# Altium PCB PCB1.PcbDoc (part 3 of 3)
Units mil, origin at the board's own origin, x right, y up, seen from the top; angles counter-clockwise.
Board outline 3543.31 x 5118.11 mil, 2 copper layers (Top Layer, Bottom Layer); 56 components, 55 nets, 300 pads, 86 vias.
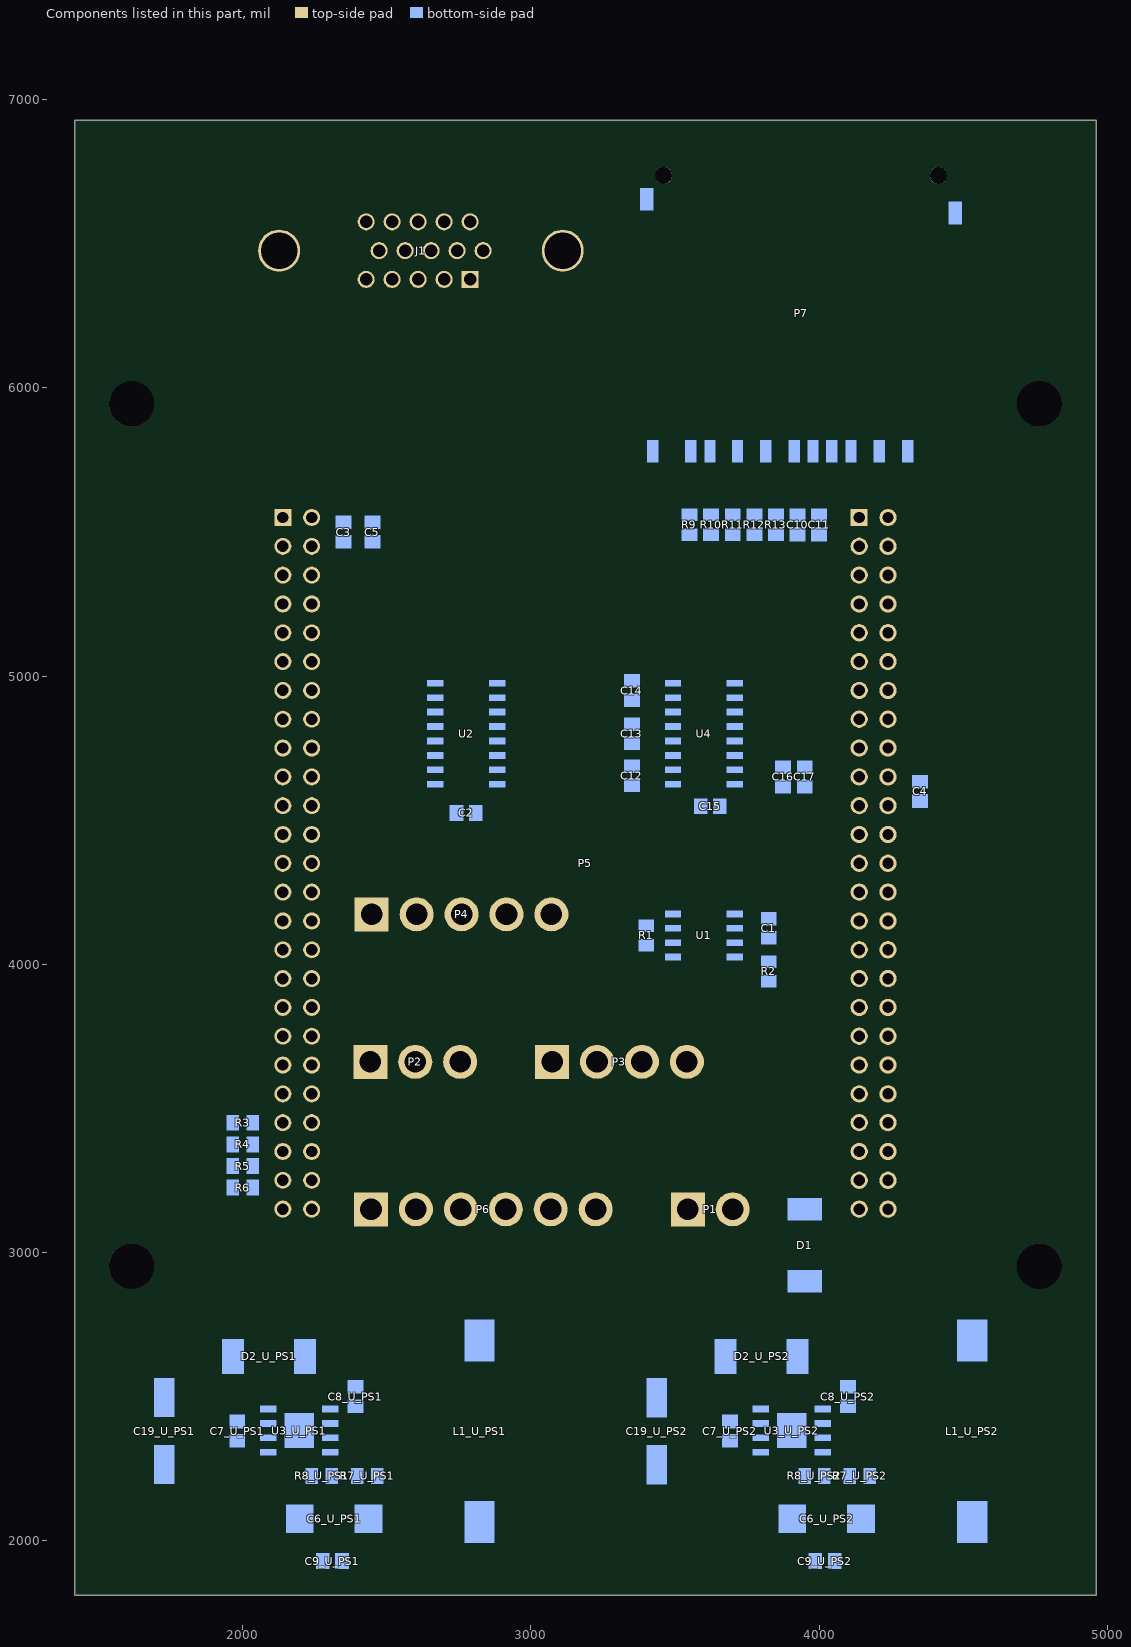
[diagram p3: the components of this part, seen from the top]

## Via types
v1: diameter 35.43/35.43 (per signal layer), hole 11.81, Top Layer to Bottom Layer, tented both sides, 52 vias
v2: diameter 47.24/47.24 (per signal layer), hole 19.68, Top Layer to Bottom Layer, tented both sides, 19 vias
v3: diameter 35.43, hole 11.81, Top Layer to Bottom Layer, tented top, 12 vias
v4: diameter 47.24/47.24 (per signal layer), hole 19.68, Top Layer to Bottom Layer, 3 vias

## Nets (pads, with @x,y where several pads share a name; then routed paths per layer and width w, separated by ;. In a path a pad name is that pad's centre, name@x,y a point inside that pad or via, vN(x,y) a via of type N, cw(c..) or ccw(c..) an arc to the next point about the centre after c; other vN are vias at no path point) (continued)
copper on no net: (continued)
  Bottom Layer w1: 1645.06,5074.6 1645.06,5111.6 ; 1645.06,5134.6 1645.06,5204.6 ; 1645.06,5210.6 1645.06,5212.6 ; 1645.06,5251.6 1645.06,5275.6 ; 1645.06,5281.6 1645.06,5283.6 ; 1645.06,5321.6 1645.06,5448.6 ; 1646.06,4827.6 1646.06,4909.6 ; 1646.06,4956.6 1646.06,4980.6 ; 1646.06,5026.6 1646.06,5051.6 ; 1646.06,5074.6 1646.06,5111.6 ; 1646.06,5134.6 1646.06,5205.6 ; 1646.06,5210.6 1646.06,5213.6 ; 1646.06,5252.6 1646.06,5276.6 ; 1646.06,5281.6 1646.06,5284.6 ; 1646.06,5319.6 1646.06,5448.6 ; 1647.06,4827.6 1647.06,4911.6 ; 1647.06,4956.6 1647.06,4984.6 ; 1647.06,5022.6 1647.06,5051.6 ; 1647.06,5074.6 1647.06,5111.6 ; 1647.06,5134.6 1647.06,5205.6 ; 1647.06,5211.6 1647.06,5213.6 ; 1647.06,5253.6 1647.06,5276.6 ; 1647.06,5282.6 1647.06,5284.6 ; 1647.06,5318.6 1647.06,5448.6 ; 1648.06,4827.6 1648.06,4924.6 ; 1648.06,4954.6 1648.06,4991.6 ; 1648.06,5015.6 1648.06,5051.6 ; 1648.06,5072.6 1648.06,5111.6 ; 1648.06,5134.6 1648.06,5205.6 ; 1648.06,5211.6 1648.06,5214.6 ; 1648.06,5254.6 1648.06,5277.6 ; 1648.06,5283.6 1648.06,5285.6 ; 1648.06,5316.6 1648.06,5448.6 ; 1649.06,4827.6 1649.06,5205.6 ; 1649.06,5211.6 1649.06,5215.6 ; 1649.06,5256.6 1649.06,5278.6 ; 1649.06,5283.6 1649.06,5286.6 ; 1649.06,5315.6 1649.06,5448.6 ; 1650.06,4827.6 1650.06,5205.6 ; 1650.06,5211.6 1650.06,5215.6 ; 1650.06,5257.6 1650.06,5278.6 ; 1650.06,5284.6 1650.06,5286.6 ; 1650.06,5313.6 1650.06,5316.6 ; 1650.06,5320.6 1650.06,5448.6 ; 1651.06,4827.6 1651.06,5205.6 ; 1651.06,5212.6 1651.06,5216.6 ; 1651.06,5259.6 1651.06,5279.6 ; 1651.06,5284.6 1651.06,5287.6 ; 1651.06,5312.6 1651.06,5315.6 ; 1651.06,5320.6 1651.06,5448.6 ; 1652.06,4827.6 1652.06,5205.6 ; 1652.06,5212.6 1652.06,5217.6 ; 1652.06,5261.6 1652.06,5280.6 ; 1652.06,5285.6 1652.06,5287.6 ; 1652.06,5310.6 1652.06,5315.6 ; 1652.06,5321.6 1652.06,5448.6 ; 1653.06,4827.6 1653.06,5206.6 ; 1653.06,5212.6 1653.06,5218.6 ; 1653.06,5262.6 1653.06,5280.6 ; 1653.06,5285.6 1653.06,5287.6 ; 1653.06,5309.6 1653.06,5315.6 ; 1653.06,5321.6 1653.06,5448.6 ; 1654.06,4827.6 1654.06,5206.6 ; 1654.06,5212.6 1654.06,5219.6 ; 1654.06,5264.6 1654.06,5281.6 ; 1654.06,5286.6 1654.06,5288.6 ; 1654.06,5308.6 1654.06,5315.6 ; 1654.06,5321.6 1654.06,5448.6 ; 1655.06,4827.6 1655.06,5206.6 ; 1655.06,5212.6 1655.06,5220.6 ; 1655.06,5265.6 1655.06,5281.6 ; 1655.06,5287.6 1655.06,5288.6 ; 1655.06,5307.6 1655.06,5316.6 ; 1655.06,5321.6 1655.06,5448.6 ; 1656.06,4827.6 1656.06,5206.6 ; 1656.06,5212.6 1656.06,5221.6 ; 1656.06,5258.6 1656.06,5259.6 ; 1656.06,5267.6 1656.06,5282.6 ; 1656.06,5287.6 1656.06,5289.6 ; 1656.06,5306.6 1656.06,5316.6 ; 1656.06,5322.6 1656.06,5448.6 ; 1657.06,4827.6 1657.06,5206.6 ; 1657.06,5212.6 1657.06,5222.6 ; 1657.06,5259.6 1657.06,5261.6 ; 1657.06,5268.6 1657.06,5283.6 ; 1657.06,5288.6 1657.06,5289.6 ; 1657.06,5306.6 1657.06,5316.6 ; 1657.06,5322.6 1657.06,5448.6 ; 1658.06,4827.6 1658.06,5206.6 ; 1658.06,5212.6 1658.06,5223.6 ; 1658.06,5260.6 1658.06,5262.6 ; 1658.06,5270.6 1658.06,5283.6 ; 1658.06,5288.6 1658.06,5290.6 ; 1658.06,5305.6 1658.06,5317.6 ; 1658.06,5322.6 1658.06,5448.6 ; 1659.06,4827.6 1659.06,5206.6 ; 1659.06,5212.6 1659.06,5224.6 ; 1659.06,5262.6 1659.06,5263.6 ; 1659.06,5271.6 1659.06,5284.6 ; 1659.06,5289.6 1659.06,5290.6 ; 1659.06,5305.6 1659.06,5317.6 ; 1659.06,5322.6 1659.06,5448.6 ; 1660.06,4827.6 1660.06,5206.6 ; 1660.06,5212.6 1660.06,5225.6 ; 1660.06,5263.6 1660.06,5265.6 ; 1660.06,5272.6 1660.06,5284.6 ; 1660.06,5289.6 1660.06,5291.6 ; 1660.06,5304.6 1660.06,5317.6 ; 1660.06,5323.6 1660.06,5448.6 ; 1661.06,4827.6 1661.06,5207.6 ; 1661.06,5212.6 1661.06,5226.6 ; 1661.06,5264.6 1661.06,5266.6 ; 1661.06,5273.6 1661.06,5284.6 ; 1661.06,5290.6 1661.06,5291.6 ; 1661.06,5304.6 1661.06,5318.6 ; 1661.06,5323.6 1661.06,5448.6 ; 1662.06,4827.6 1662.06,5137.6 ; 1662.06,5139.6 1662.06,5207.6 ; 1662.06,5212.6 1662.06,5225.6 ; 1662.06,5266.6 1662.06,5268.6 ; 1662.06,5274.6 1662.06,5285.6 ; 1662.06,5290.6 1662.06,5292.6 ; 1662.06,5303.6 1662.06,5318.6 ; 1662.06,5323.6 1662.06,5448.6 ; 1663.06,4827.6 1663.06,5137.6 ; 1663.06,5143.6 1663.06,5207.6 ; 1663.06,5213.6 1663.06,5225.6 ; 1663.06,5267.6 1663.06,5269.6 ; 1663.06,5275.6 1663.06,5285.6 ; 1663.06,5290.6 1663.06,5292.6 ; 1663.06,5303.6 1663.06,5319.6 ; 1663.06,5324.6 1663.06,5448.6 ; 1664.06,4827.6 1664.06,5138.6 ; 1664.06,5146.6 1664.06,5207.6 ; 1664.06,5213.6 1664.06,5225.6 ; 1664.06,5269.6 1664.06,5270.6 ; 1664.06,5275.6 1664.06,5286.6 ; 1664.06,5291.6 1664.06,5292.6 ; 1664.06,5302.6 1664.06,5319.6 ; 1664.06,5324.6 1664.06,5448.6 ; 1665.06,4827.6 1665.06,5140.6 ; 1665.06,5149.6 1665.06,5207.6 ; 1665.06,5213.6 1665.06,5225.6 ; 1665.06,5270.6 1665.06,5272.6 ; 1665.06,5275.6 1665.06,5286.6 ; 1665.06,5291.6 1665.06,5293.6 ; 1665.06,5302.6 1665.06,5320.6 ; 1665.06,5325.6 1665.06,5448.6 ; 1666.06,4827.6 1666.06,5142.6 ; 1666.06,5153.6 1666.06,5202.6 ; 1666.06,5205.6 1666.06,5207.6 ; 1666.06,5213.6 1666.06,5225.6 ; 1666.06,5271.6 1666.06,5286.6 ; 1666.06,5291.6 1666.06,5293.6 ; 1666.06,5301.6 1666.06,5320.6 ; 1666.06,5325.6 1666.06,5448.6 ; 1667.06,4827.6 1667.06,5144.6 ; 1667.06,5159.6 1667.06,5192.6 ; 1667.06,5205.6 1667.06,5207.6 ; 1667.06,5213.6 1667.06,5225.6 ; 1667.06,5272.6 1667.06,5287.6 ; 1667.06,5292.6 1667.06,5293.6 ; 1667.06,5300.6 1667.06,5320.6 ; 1667.06,5326.6 1667.06,5448.6 ; 1668.06,4827.6 1668.06,5147.6 ; 1668.06,5167.6 1668.06,5182.6 ; 1668.06,5205.6 1668.06,5208.6 ; 1668.06,5214.6 1668.06,5225.6 ; 1668.06,5273.6 1668.06,5287.6 ; 1668.06,5292.6 1668.06,5293.6 ; 1668.06,5300.6 1668.06,5321.6 ; 1668.06,5326.6 1668.06,5448.6 ; 1669.06,4827.6 1669.06,5149.6 ; 1669.06,5206.6 1669.06,5208.6 ; 1669.06,5214.6 1669.06,5225.6 ; 1669.06,5267.6 1669.06,5268.6 ; 1669.06,5273.6 1669.06,5287.6 ; 1669.06,5292.6 1669.06,5294.6 ; 1669.06,5299.6 1669.06,5321.6 ; 1669.06,5327.6 1669.06,5448.6 ; 1670.06,4827.6 1670.06,5153.6 ; 1670.06,5206.6 1670.06,5208.6 ; 1670.06,5214.6 1670.06,5225.6 ; 1670.06,5268.6 1670.06,5270.6 ; 1670.06,5273.6 1670.06,5288.6 ; 1670.06,5292.6 1670.06,5294.6 ; 1670.06,5298.6 1670.06,5322.6 ; 1670.06,5327.6 1670.06,5448.6 ; 1671.06,4827.6 1671.06,5157.6 ; 1671.06,5206.6 1671.06,5208.6 ; 1671.06,5214.6 1671.06,5225.6 ; 1671.06,5268.6 1671.06,5288.6 ; 1671.06,5292.6 1671.06,5294.6 ; 1671.06,5297.6 1671.06,5322.6 ; 1671.06,5328.6 1671.06,5448.6 ; 1672.06,4827.6 1672.06,5162.6 ; 1672.06,5197.6 1672.06,5209.6 ; 1672.06,5214.6 1672.06,5224.6 ; 1672.06,5268.6 1672.06,5288.6 ; 1672.06,5292.6 1672.06,5294.6 ; 1672.06,5295.6 1672.06,5323.6 ; 1672.06,5328.6 1672.06,5448.6 ; 1673.06,4827.6 1673.06,5172.6 ; 1673.06,5188.6 1673.06,5209.6 ; 1673.06,5215.6 1673.06,5224.6 ; 1673.06,5268.6 1673.06,5288.6 ; 1673.06,5292.6 1673.06,5324.6 ; 1673.06,5329.6 1673.06,5448.6 ; 1674.06,4827.6 1674.06,5209.6 ; 1674.06,5215.6 1674.06,5224.6 ; 1674.06,5230.6 1674.06,5231.6 ; 1674.06,5268.6 1674.06,5288.6 ; 1674.06,5292.6 1674.06,5324.6 ; 1674.06,5329.6 1674.06,5448.6 ; 1675.06,4827.6 1675.06,5210.6 ; 1675.06,5215.6 1675.06,5224.6 ; 1675.06,5229.6 1675.06,5231.6 ; 1675.06,5268.6 1675.06,5288.6 ; 1675.06,5292.6 1675.06,5325.6 ; 1675.06,5330.6 1675.06,5448.6 ; 1676.06,4827.6 1676.06,5210.6 ; 1676.06,5215.6 1676.06,5224.6 ; 1676.06,5229.6 1676.06,5232.6 ; 1676.06,5269.6 1676.06,5282.6 ; 1676.06,5285.6 1676.06,5287.6 ; 1676.06,5292.6 1676.06,5325.6 ; 1676.06,5330.6 1676.06,5448.6 ; 1677.06,4827.6 1677.06,5210.6 ; 1677.06,5216.6 1677.06,5223.6 ; 1677.06,5229.6 1677.06,5233.6 ; 1677.06,5269.6 1677.06,5282.6 ; 1677.06,5286.6 1677.06,5287.6 ; 1677.06,5292.6 1677.06,5326.6 ; 1677.06,5331.6 1677.06,5448.6 ; 1678.06,4827.6 1678.06,5210.6 ; 1678.06,5216.6 1678.06,5223.6 ; 1678.06,5229.6 1678.06,5234.6 ; 1678.06,5269.6 1678.06,5282.6 ; 1678.06,5286.6 1678.06,5287.6 ; 1678.06,5292.6 1678.06,5326.6 ; 1678.06,5332.6 1678.06,5448.6 ; 1679.06,4827.6 1679.06,5211.6 ; 1679.06,5216.6 1679.06,5223.6 ; 1679.06,5228.6 1679.06,5234.6 ; 1679.06,5269.6 1679.06,5282.6 ; 1679.06,5286.6 1679.06,5287.6 ; 1679.06,5292.6 1679.06,5327.6 ; 1679.06,5333.6 1679.06,5448.6 ; 1680.06,4827.6 1680.06,5211.6 ; 1680.06,5216.6 1680.06,5223.6 ; 1680.06,5228.6 1680.06,5235.6 ; 1680.06,5269.6 1680.06,5282.6 ; 1680.06,5291.6 1680.06,5327.6 ; 1680.06,5334.6 1680.06,5448.6 ; 1681.06,4827.6 1681.06,5211.6 ; 1681.06,5216.6 1681.06,5223.6 ; 1681.06,5228.6 1681.06,5236.6 ; 1681.06,5269.6 1681.06,5282.6 ; 1681.06,5291.6 1681.06,5328.6 ; 1681.06,5336.6 1681.06,5448.6 ; 1682.06,4827.6 1682.06,5211.6 ; 1682.06,5216.6 1682.06,5223.6 ; 1682.06,5227.6 1682.06,5237.6 ; 1682.06,5269.6 1682.06,5282.6 ; 1682.06,5291.6 1682.06,5329.6 ; 1682.06,5340.6 1682.06,5448.6 ; 1683.06,4827.6 1683.06,5211.6 ; 1683.06,5216.6 1683.06,5223.6 ; 1683.06,5227.6 1683.06,5238.6 ; 1683.06,5269.6 1683.06,5282.6 ; 1683.06,5290.6 1683.06,5329.6 ; 1683.06,5343.6 1683.06,5448.6 ; 1684.06,4827.6 1684.06,5211.6 ; 1684.06,5216.6 1684.06,5222.6 ; 1684.06,5227.6 1684.06,5238.6 ; 1684.06,5269.6 1684.06,5282.6 ; 1684.06,5290.6 1684.06,5330.6 ; 1684.06,5347.6 1684.06,5448.6 ; 1685.06,4827.6 1685.06,5210.6 ; 1685.06,5216.6 1685.06,5222.6 ; 1685.06,5227.6 1685.06,5239.6 ; 1685.06,5269.6 1685.06,5282.6 ; 1685.06,5290.6 1685.06,5331.6 ; 1685.06,5351.6 1685.06,5448.6 ; 1686.06,4827.6 1686.06,5210.6 ; 1686.06,5216.6 1686.06,5222.6 ; 1686.06,5227.6 1686.06,5240.6 ; 1686.06,5269.6 1686.06,5283.6 ; 1686.06,5289.6 1686.06,5331.6 ; 1686.06,5355.6 1686.06,5448.6 ; 1687.06,4827.6 1687.06,5210.6 ; 1687.06,5215.6 1687.06,5222.6 ; 1687.06,5227.6 1687.06,5241.6 ; 1687.06,5269.6 1687.06,5283.6 ; 1687.06,5289.6 1687.06,5332.6 ; 1687.06,5338.6 1687.06,5341.6 ; 1687.06,5359.6 1687.06,5448.6 ; 1688.06,4827.6 1688.06,5210.6 ; 1688.06,5215.6 1688.06,5222.6 ; 1688.06,5227.6 1688.06,5241.6 ; 1688.06,5270.6 1688.06,5283.6 ; 1688.06,5288.6 1688.06,5333.6 ; 1688.06,5339.6 1688.06,5345.6 ; 1688.06,5365.6 1688.06,5448.6 ; 1689.06,4827.6 1689.06,5209.6 ; 1689.06,5215.6 1689.06,5223.6 ; 1689.06,5227.6 1689.06,5242.6 ; 1689.06,5270.6 1689.06,5283.6 ; 1689.06,5288.6 1689.06,5333.6 ; 1689.06,5340.6 1689.06,5349.6 ; 1689.06,5371.6 1689.06,5448.6 ; 1690.06,4827.6 1690.06,5209.6 ; 1690.06,5215.6 1690.06,5223.6 ; 1690.06,5227.6 1690.06,5243.6 ; 1690.06,5270.6 1690.06,5283.6 ; 1690.06,5289.6 1690.06,5334.6 ; 1690.06,5341.6 1690.06,5352.6 ; 1690.06,5377.6 1690.06,5448.6 ; 1691.06,4827.6 1691.06,5209.6 ; 1691.06,5215.6 1691.06,5223.6 ; 1691.06,5227.6 1691.06,5244.6 ; 1691.06,5270.6 1691.06,5283.6 ; 1691.06,5289.6 1691.06,5335.6 ; 1691.06,5341.6 1691.06,5356.6 ; 1691.06,5387.6 1691.06,5402.6 ; 1691.06,5412.6 1691.06,5448.6 ; 1692.06,4827.6 1692.06,5209.6 ; 1692.06,5215.6 1692.06,5223.6 ; 1692.06,5227.6 1692.06,5241.6 ; 1692.06,5243.6 1692.06,5245.6 ; 1692.06,5270.6 1692.06,5283.6 ; 1692.06,5289.6 1692.06,5336.6 ; 1692.06,5341.6 1692.06,5361.6 ; 1692.06,5412.6 1692.06,5448.6 ; 1693.06,4827.6 1693.06,5209.6 ; 1693.06,5215.6 1693.06,5223.6 ; 1693.06,5228.6 1693.06,5239.6 ; 1693.06,5244.6 1693.06,5246.6 ; 1693.06,5270.6 1693.06,5283.6 ; 1693.06,5289.6 1693.06,5337.6 ; 1693.06,5341.6 1693.06,5368.6 ; 1693.06,5408.6 1693.06,5448.6 ; 1694.06,4827.6 1694.06,5209.6 ; 1694.06,5215.6 1694.06,5223.6 ; 1694.06,5228.6 1694.06,5238.6 ; 1694.06,5245.6 1694.06,5247.6 ; 1694.06,5270.6 1694.06,5283.6 ; 1694.06,5289.6 1694.06,5376.6 ; 1694.06,5400.6 1694.06,5448.6 ; 1695.06,4827.6 1695.06,5209.6 ; 1695.06,5215.6 1695.06,5223.6 ; 1695.06,5228.6 1695.06,5236.6 ; 1695.06,5246.6 1695.06,5248.6 ; 1695.06,5270.6 1695.06,5283.6 ; 1695.06,5289.6 1695.06,5448.6 ; 1696.06,4827.6 1696.06,5209.6 ; 1696.06,5215.6 1696.06,5223.6 ; 1696.06,5228.6 1696.06,5235.6 ; 1696.06,5247.6 1696.06,5249.6 ; 1696.06,5270.6 1696.06,5284.6 ; 1696.06,5289.6 1696.06,5448.6 ; 1697.06,4827.6 1697.06,5209.6 ; 1697.06,5215.6 1697.06,5223.6 ; 1697.06,5228.6 1697.06,5233.6 ; 1697.06,5247.6 1697.06,5251.6 ; 1697.06,5270.6 1697.06,5284.6 ; 1697.06,5289.6 1697.06,5448.6 ; 1698.06,4827.6 1698.06,5209.6 ; 1698.06,5215.6 1698.06,5223.6 ; 1698.06,5228.6 1698.06,5231.6 ; 1698.06,5242.6 1698.06,5252.6 ; 1698.06,5270.6 1698.06,5284.6 ; 1698.06,5289.6 1698.06,5448.6 ; 1699.06,4827.6 1699.06,5209.6 ; 1699.06,5215.6 1699.06,5224.6 ; 1699.06,5228.6 1699.06,5230.6 ; 1699.06,5240.6 1699.06,5253.6 ; 1699.06,5270.6 1699.06,5284.6 ; 1699.06,5289.6 1699.06,5448.6 ; 1700.06,4827.6 1700.06,5203.6 ; 1700.06,5207.6 1700.06,5209.6 ; 1700.06,5215.6 1700.06,5224.6 ; 1700.06,5228.6 1700.06,5229.6 ; 1700.06,5239.6 1700.06,5255.6 ; 1700.06,5270.6 1700.06,5284.6 ; 1700.06,5289.6 1700.06,5448.6 ; 1701.06,4827.6 1701.06,5201.6 ; 1701.06,5207.6 1701.06,5209.6 ; 1701.06,5214.6 1701.06,5224.6 ; 1701.06,5228.6 1701.06,5229.6 ; 1701.06,5237.6 1701.06,5256.6 ; 1701.06,5270.6 1701.06,5284.6 ; 1701.06,5289.6 1701.06,5448.6 ; 1702.06,4827.6 1702.06,5198.6 ; 1702.06,5207.6 1702.06,5209.6 ; 1702.06,5212.6 1702.06,5214.6 ; 1702.06,5215.6 1702.06,5224.6 ; 1702.06,5228.6 1702.06,5229.6 ; 1702.06,5236.6 1702.06,5258.6 ; 1702.06,5271.6 1702.06,5284.6 ; 1702.06,5289.6 1702.06,5448.6 ; 1703.06,4827.6 1703.06,5196.6 ; 1703.06,5207.6 1703.06,5213.6 ; 1703.06,5216.6 1703.06,5224.6 ; 1703.06,5228.6 1703.06,5229.6 ; 1703.06,5235.6 1703.06,5259.6 ; 1703.06,5271.6 1703.06,5284.6 ; 1703.06,5288.6 1703.06,5448.6 ; 1704.06,4827.6 1704.06,5193.6 ; 1704.06,5207.6 1704.06,5209.6 ; 1704.06,5211.6 1704.06,5213.6 ; 1704.06,5217.6 1704.06,5224.6 ; 1704.06,5228.6 1704.06,5229.6 ; 1704.06,5234.6 1704.06,5261.6 ; 1704.06,5271.6 1704.06,5284.6 ; 1704.06,5288.6 1704.06,5448.6 ; 1705.06,4827.6 1705.06,5191.6 ; 1705.06,5206.6 1705.06,5209.6 ; 1705.06,5213.6 1705.06,5214.6 ; 1705.06,5218.6 1705.06,5224.6 ; 1705.06,5228.6 1705.06,5229.6 ; 1705.06,5233.6 1705.06,5263.6 ; 1705.06,5272.6 1705.06,5283.6 ; 1705.06,5288.6 1705.06,5448.6 ; 1706.06,4827.6 1706.06,5188.6 ; 1706.06,5204.6 1706.06,5210.6 ; 1706.06,5219.6 1706.06,5223.6 ; 1706.06,5228.6 1706.06,5229.6 ; 1706.06,5231.6 1706.06,5266.6 ; 1706.06,5272.6 1706.06,5283.6 ; 1706.06,5288.6 1706.06,5448.6 ; 1707.06,4827.6 1707.06,5185.6 ; 1707.06,5202.6 1707.06,5211.6 ; 1707.06,5220.6 1707.06,5223.6 ; 1707.06,5228.6 1707.06,5229.6 ; 1707.06,5230.6 1707.06,5266.6 ; 1707.06,5272.6 1707.06,5283.6 ; 1707.06,5288.6 1707.06,5448.6 ; 1708.06,4827.6 1708.06,5182.6 ; 1708.06,5200.6 1708.06,5212.6 ; 1708.06,5221.6 1708.06,5222.6 ; 1708.06,5227.6 1708.06,5266.6 ; 1708.06,5273.6 1708.06,5283.6 ; 1708.06,5288.6 1708.06,5448.6 ; 1709.06,4827.6 1709.06,5179.6 ; 1709.06,5198.6 1709.06,5213.6 ; 1709.06,5227.6 1709.06,5267.6 ; 1709.06,5273.6 1709.06,5283.6 ; 1709.06,5288.6 1709.06,5448.6 ; 1710.06,4827.6 1710.06,5176.6 ; 1710.06,5195.6 1710.06,5214.6 ; 1710.06,5227.6 1710.06,5267.6 ; 1710.06,5273.6 1710.06,5283.6 ; 1710.06,5288.6 1710.06,5448.6 ; 1711.06,4827.6 1711.06,5172.6 ; 1711.06,5192.6 1711.06,5216.6 ; 1711.06,5226.6 1711.06,5267.6 ; 1711.06,5274.6 1711.06,5283.6 ; 1711.06,5288.6 1711.06,5448.6 ; 1712.06,4827.6 1712.06,5169.6 ; 1712.06,5189.6 1712.06,5214.6 ; 1712.06,5216.6 1712.06,5218.6 ; 1712.06,5225.6 1712.06,5268.6 ; 1712.06,5274.6 1712.06,5283.6 ; 1712.06,5288.6 1712.06,5290.6 ; 1712.06,5294.6 1712.06,5448.6 ; 1713.06,4827.6 1713.06,5166.6 ; 1713.06,5186.6 1713.06,5212.6 ; 1713.06,5218.6 1713.06,5268.6 ; 1713.06,5275.6 1713.06,5283.6 ; 1713.06,5288.6 1713.06,5290.6 ; 1713.06,5297.6 1713.06,5448.6 ; 1714.06,4827.6 1714.06,5162.6 ; 1714.06,5183.6 1714.06,5210.6 ; 1714.06,5220.6 1714.06,5269.6 ; 1714.06,5275.6 1714.06,5284.6 ; 1714.06,5289.6 1714.06,5290.6 ; 1714.06,5299.6 1714.06,5448.6 ; 1715.06,4827.6 1715.06,5158.6 ; 1715.06,5179.6 1715.06,5208.6 ; 1715.06,5220.6 1715.06,5269.6 ; 1715.06,5275.6 1715.06,5284.6 ; 1715.06,5289.6 1715.06,5290.6 ; 1715.06,5302.6 1715.06,5448.6 ; 1716.06,4827.6 1716.06,5155.6 ; 1716.06,5176.6 1716.06,5206.6 ; 1716.06,5219.6 1716.06,5270.6 ; 1716.06,5276.6 1716.06,5285.6 ; 1716.06,5290.6 1716.06,5291.6 ; 1716.06,5304.6 1716.06,5448.6 ; 1717.06,4827.6 1717.06,5151.6 ; 1717.06,5172.6 1717.06,5203.6 ; 1717.06,5217.6 1717.06,5270.6 ; 1717.06,5276.6 1717.06,5285.6 ; 1717.06,5290.6 1717.06,5291.6 ; 1717.06,5307.6 1717.06,5448.6 ; 1718.06,4827.6 1718.06,5147.6 ; 1718.06,5168.6 1718.06,5200.6 ; 1718.06,5215.6 1718.06,5271.6 ; 1718.06,5277.6 1718.06,5286.6 ; 1718.06,5290.6 1718.06,5291.6 ; 1718.06,5309.6 1718.06,5448.6 ; 1719.06,4827.6 1719.06,5142.6 ; 1719.06,5165.6 1719.06,5198.6 ; 1719.06,5213.6 1719.06,5271.6 ; 1719.06,5277.6 1719.06,5286.6 ; 1719.06,5291.6 1719.06,5292.6 ; 1719.06,5311.6 1719.06,5448.6 ; 1720.06,4827.6 1720.06,5138.6 ; 1720.06,5161.6 1720.06,5195.6 ; 1720.06,5211.6 1720.06,5272.6 ; 1720.06,5278.6 1720.06,5289.6 ; 1720.06,5291.6 1720.06,5292.6 ; 1720.06,5314.6 1720.06,5448.6 ; 1721.06,4827.6 1721.06,5133.6 ; 1721.06,5157.6 1721.06,5192.6 ; 1721.06,5208.6 1721.06,5273.6 ; 1721.06,5279.6 1721.06,5294.6 ; 1721.06,5316.6 1721.06,5448.6 ; 1722.06,4827.6 1722.06,5128.6 ; 1722.06,5153.6 1722.06,5188.6 ; 1722.06,5206.6 1722.06,5273.6 ; 1722.06,5279.6 1722.06,5298.6 ; 1722.06,5318.6 1722.06,5448.6 ; 1723.06,4827.6 1723.06,5122.6 ; 1723.06,5149.6 1723.06,5185.6 ; 1723.06,5203.6 1723.06,5274.6 ; 1723.06,5280.6 1723.06,5289.6 ; 1723.06,5291.6 1723.06,5301.6 ; 1723.06,5320.6 1723.06,5448.6 ; 1724.06,4827.6 1724.06,5117.6 ; 1724.06,5144.6 1724.06,5181.6 ; 1724.06,5199.6 1724.06,5275.6 ; 1724.06,5281.6 1724.06,5288.6 ; 1724.06,5291.6 1724.06,5292.6 ; 1724.06,5294.6 1724.06,5304.6 ; 1724.06,5322.6 1724.06,5448.6 ; 1725.06,4827.6 1725.06,5112.6 ; 1725.06,5140.6 1725.06,5178.6 ; 1725.06,5196.6 1725.06,5275.6 ; 1725.06,5281.6 1725.06,5286.6 ; 1725.06,5294.6 1725.06,5307.6 ; 1725.06,5325.6 1725.06,5448.6 ; 1726.06,4827.6 1726.06,5107.6 ; 1726.06,5135.6 1726.06,5174.6 ; 1726.06,5193.6 1726.06,5276.6 ; 1726.06,5283.6 1726.06,5285.6 ; 1726.06,5294.6 1726.06,5310.6 ; 1726.06,5327.6 1726.06,5448.6 ; 1727.06,4827.6 1727.06,5101.6 ; 1727.06,5130.6 1727.06,5170.6 ; 1727.06,5189.6 1727.06,5277.6 ; 1727.06,5294.6 1727.06,5312.6 ; 1727.06,5329.6 1727.06,5448.6 ; 1728.06,4827.6 1728.06,5096.6 ; 1728.06,5125.6 1728.06,5166.6 ; 1728.06,5185.6 1728.06,5278.6 ; 1728.06,5293.6 1728.06,5315.6 ; 1728.06,5331.6 1728.06,5448.6 ; 1729.06,4827.6 1729.06,5091.6 ; 1729.06,5119.6 1729.06,5161.6 ; 1729.06,5181.6 1729.06,5278.6 ; 1729.06,5291.6 1729.06,5318.6 ; 1729.06,5333.6 1729.06,5448.6 ; 1730.06,4827.6 1730.06,5085.6 ; 1730.06,5114.6 1730.06,5157.6 ; 1730.06,5177.6 1730.06,5280.6 ; 1730.06,5289.6 1730.06,5291.6 ; 1730.06,5295.6 1730.06,5320.6 ; 1730.06,5336.6 1730.06,5448.6 ; 1731.06,4827.6 1731.06,5080.6 ; 1731.06,5108.6 1731.06,5152.6 ; 1731.06,5173.6 1731.06,5281.6 ; 1731.06,5287.6 1731.06,5289.6 ; 1731.06,5299.6 1731.06,5322.6 ; 1731.06,5338.6 1731.06,5448.6 ; 1732.06,4827.6 1732.06,5074.6 ; 1732.06,5102.6 1732.06,5147.6 ; 1732.06,5169.6 1732.06,5285.6 ; 1732.06,5302.6 1732.06,5325.6 ; 1732.06,5340.6 1732.06,5448.6 ; 1733.06,4827.6 1733.06,5068.6 ; 1733.06,5095.6 1733.06,5142.6 ; 1733.06,5165.6 1733.06,5285.6 ; 1733.06,5306.6 1733.06,5327.6 ; 1733.06,5342.6 1733.06,5448.6 ; 1734.06,4827.6 1734.06,5062.6 ; 1734.06,5089.6 1734.06,5137.6 ; 1734.06,5160.6 1734.06,5286.6 ; 1734.06,5309.6 1734.06,5329.6 ; 1734.06,5344.6 1734.06,5448.6 ; 1735.06,4827.6 1735.06,5054.6 ; 1735.06,5081.6 1735.06,5131.6 ; 1735.06,5156.6 1735.06,5289.6 ; 1735.06,5312.6 1735.06,5332.6 ; 1735.06,5346.6 1735.06,5448.6 ; 1736.06,4827.6 1736.06,5045.6 ; 1736.06,5072.6 1736.06,5125.6 ; 1736.06,5151.6 1736.06,5293.6 ; 1736.06,5315.6 1736.06,5334.6 ; 1736.06,5348.6 1736.06,5448.6 ; 1737.06,4827.6 1737.06,5045.6 ; 1737.06,5061.6 1737.06,5119.6 ; 1737.06,5146.6 1737.06,5297.6 ; 1737.06,5318.6 1737.06,5336.6 ; 1737.06,5350.6 1737.06,5448.6 ; 1738.06,4827.6 1738.06,5113.6 ; 1738.06,5141.6 1738.06,5300.6 ; 1738.06,5320.6 1738.06,5338.6 ; 1738.06,5352.6 1738.06,5448.6 ; 1739.06,4827.6 1739.06,5107.6 ; 1739.06,5136.6 1739.06,5304.6 ; 1739.06,5323.6 1739.06,5340.6 ; 1739.06,5354.6 1739.06,5448.6 ; 1740.06,4827.6 1740.06,5100.6 ; 1740.06,5131.6 1740.06,5308.6 ; 1740.06,5325.6 1740.06,5342.6 ; 1740.06,5356.6 1740.06,5448.6 ; 1741.06,4827.6 1741.06,5092.6 ; 1741.06,5125.6 1741.06,5311.6 ; 1741.06,5328.6 1741.06,5344.6 ; 1741.06,5357.6 1741.06,5448.6 ; 1742.06,4827.6 1742.06,5084.6 ; 1742.06,5119.6 1742.06,5314.6 ; 1742.06,5330.6 1742.06,5346.6 ; 1742.06,5359.6 1742.06,5448.6 ; 1743.06,4827.6 1743.06,4960.6 ; 1743.06,4963.6 1743.06,5075.6 ; 1743.06,5113.6 1743.06,5317.6 ; 1743.06,5332.6 1743.06,5348.6 ; 1743.06,5361.6 1743.06,5448.6 ; 1744.06,4827.6 1744.06,4960.6 ; 1744.06,4981.6 1744.06,5064.6 ; 1744.06,5107.6 1744.06,5320.6 ; 1744.06,5335.6 1744.06,5350.6 ; 1744.06,5363.6 1744.06,5448.6 ; 1745.06,4827.6 1745.06,4960.6 ; 1745.06,5002.6 1745.06,5051.6 ; 1745.06,5099.6 1745.06,5323.6 ; 1745.06,5337.6 1745.06,5352.6 ; 1745.06,5364.6 1745.06,5448.6 ; 1746.06,4827.6 1746.06,4971.6 ; 1746.06,5091.6 1746.06,5326.6 ; 1746.06,5339.6 1746.06,5354.6 ; 1746.06,5366.6 1746.06,5448.6 ; 1747.06,4827.6 1747.06,4978.6 ; 1747.06,5083.6 1747.06,5328.6 ; 1747.06,5341.6 1747.06,5356.6 ; 1747.06,5368.6 1747.06,5448.6 ; 1748.06,4827.6 1748.06,4987.6 ; 1748.06,5075.6 1748.06,5331.6 ; 1748.06,5343.6 1748.06,5358.6 ; 1748.06,5369.6 1748.06,5448.6 ; 1749.06,4827.6 1749.06,4995.6 ; 1749.06,5066.6 1749.06,5333.6 ; 1749.06,5346.6 1749.06,5360.6 ; 1749.06,5371.6 1749.06,5448.6 ; 1750.06,4827.6 1750.06,5029.6 ; 1750.06,5055.6 1750.06,5336.6 ; 1750.06,5348.6 1750.06,5361.6 ; 1750.06,5372.6 1750.06,5448.6 ; 1751.06,4827.6 1751.06,5338.6 ; 1751.06,5350.6 1751.06,5363.6 ; 1751.06,5374.6 1751.06,5448.6 ; 1752.06,4827.6 1752.06,5340.6 ; 1752.06,5352.6 1752.06,5365.6 ; 1752.06,5376.6 1752.06,5448.6 ; 1753.06,4827.6 1753.06,5342.6 ; 1753.06,5354.6 1753.06,5366.6 ; 1753.06,5377.6 1753.06,5448.6 ; 1754.06,4827.6 1754.06,5345.6 ; 1754.06,5356.6 1754.06,5368.6 ; 1754.06,5379.6 1754.06,5448.6 ; 1755.06,4827.6 1755.06,5347.6 ; 1755.06,5358.6 1755.06,5370.6 ; 1755.06,5380.6 1755.06,5448.6 ; 1756.06,4827.6 1756.06,5349.6 ; 1756.06,5360.6 1756.06,5371.6 ; 1756.06,5382.6 1756.06,5448.6 ; 1757.06,4827.6 1757.06,5351.6 ; 1757.06,5361.6 1757.06,5373.6 ; 1757.06,5384.6 1757.06,5448.6 ; 1758.06,4827.6 1758.06,5354.6 ; 1758.06,5363.6 1758.06,5375.6 ; 1758.06,5385.6 1758.06,5448.6 ; 1759.06,4827.6 1759.06,5356.6 ; 1759.06,5365.6 1759.06,5376.6 ; 1759.06,5387.6 1759.06,5448.6 ; 1760.06,4827.6 1760.06,5358.6 ; 1760.06,5367.6 1760.06,5378.6 ; 1760.06,5388.6 1760.06,5448.6 ; 1761.06,4827.6 1761.06,5360.6 ; 1761.06,5369.6 1761.06,5380.6 ; 1761.06,5390.6 1761.06,5448.6 ; 1762.06,4827.6 1762.06,5362.6 ; 1762.06,5371.6 1762.06,5381.6 ; 1762.06,5391.6 1762.06,5448.6 ; 1763.06,4827.6 1763.06,5364.6 ; 1763.06,5373.6 1763.06,5383.6 ; 1763.06,5393.6 1763.06,5448.6 ; 1764.06,4827.6 1764.06,5366.6 ; 1764.06,5375.6 1764.06,5385.6 ; 1764.06,5394.6 1764.06,5448.6 ; 1765.06,4827.6 1765.06,5368.6 ; 1765.06,5376.6 1765.06,5386.6 ; 1765.06,5396.6 1765.06,5448.6 ; 1766.06,4827.6 1766.06,5370.6 ; 1766.06,5378.6 1766.06,5388.6 ; 1766.06,5397.6 1766.06,5448.6 ; 1767.06,4827.6 1767.06,5372.6 ; 1767.06,5380.6 1767.06,5390.6 ; 1767.06,5399.6 1767.06,5448.6 ; 1768.06,4827.6 1768.06,5374.6 ; 1768.06,5381.6 1768.06,5391.6 ; 1768.06,5400.6 1768.06,5448.6 ; 1769.06,4827.6 1769.06,5376.6 ; 1769.06,5383.6 1769.06,5393.6 ; 1769.06,5402.6 1769.06,5448.6 ; 1770.06,4827.6 1770.06,5378.6 ; 1770.06,5384.6 1770.06,5395.6 ; 1770.06,5403.6 1770.06,5448.6 ; 1771.06,4827.6 1771.06,5380.6 ; 1771.06,5386.6 1771.06,5396.6 ; 1771.06,5405.6 1771.06,5448.6 ; 1772.06,4827.6 1772.06,5383.6 ; 1772.06,5388.6 1772.06,5398.6 ; 1772.06,5406.6 1772.06,5448.6 ; 1773.06,4827.6 1773.06,5385.6 ; 1773.06,5388.6 1773.06,5399.6 ; 1773.06,5407.6 1773.06,5448.6 ; 1774.06,4827.6 1774.06,5387.6 ; 1774.06,5388.6 1774.06,5401.6 ; 1774.06,5409.6 1774.06,5448.6 ; 1775.06,4827.6 1775.06,5402.6 ; 1775.06,5410.6 1775.06,5448.6 ; 1776.06,4827.6 1776.06,5404.6 ; 1776.06,5411.6 1776.06,5448.6 ; 1777.06,4827.6 1777.06,5405.6 ; 1777.06,5413.6 1777.06,5448.6 ; 1778.06,4827.6 1778.06,5407.6 ; 1778.06,5414.6 1778.06,5448.6 ; 1779.06,4827.6 1779.06,5408.6 ; 1779.06,5415.6 1779.06,5448.6 ; 1780.06,4827.6 1780.06,5410.6 ; 1780.06,5416.6 1780.06,5448.6 ; 1781.06,4827.6 1781.06,5411.6 ; 1781.06,5417.6 1781.06,5448.6 ; 1782.06,4827.6 1782.06,5413.6 ; 1782.06,5418.6 1782.06,5448.6 ; 1783.06,4827.6 1783.06,5415.6 ; 1783.06,5420.6 1783.06,5448.6 ; 1784.06,4827.6 1784.06,5416.6 ; 1784.06,5421.6 1784.06,5448.6 ; 1785.06,4827.6 1785.06,5418.6 ; 1785.06,5422.6 1785.06,5448.6 ; 1786.06,4827.6 1786.06,5419.6 ; 1786.06,5422.6 1786.06,5448.6 ; 1787.06,4827.6 1787.06,5421.6 ; 1787.06,5422.6 1787.06,5448.6 ; 1788.06,4827.6 1788.06,5448.6 ; 1789.06,4827.6 1789.06,5448.6 ; 1790.06,4827.6 1790.06,5448.6 ; 1791.06,4827.6 1791.06,5448.6 ; 1792.06,4827.6 1792.06,5448.6 ; 1793.06,4827.6 1793.06,5448.6 ; 1794.06,4827.6 1794.06,5448.6 ; 1795.06,4827.6 1795.06,5448.6 ; 1796.06,4827.6 1796.06,5448.6 ; 1797.06,4827.6 1797.06,5448.6 ; 1798.06,4827.6 1798.06,5448.6 ; 1799.06,4827.6 1799.06,5448.6 ; 1800.06,4827.6 1800.06,5448.6 ; 1801.06,4827.6 1801.06,5448.6 ; 1802.06,4827.6 1802.06,5448.6 ; 1803.06,4827.6 1803.06,5448.6 ; 1804.06,4827.6 1804.06,5448.6 ; 1805.06,4827.6 1805.06,5448.6 ; 1806.06,4827.6 1806.06,5448.6 ; 1807.06,4827.6 1807.06,5448.6 ; 1808.06,4827.6 1808.06,5448.6 ; 1809.06,4827.6 1809.06,5448.6

## Polygon pours and split planes (outlines as drawn)
GND on Top Layer "Top_Digital_GND" (solid, remove dead copper, shelved, pour order 13): 1417.32,2850 1417.32,6929.13 4960.63,6929.13 4960.63,2850 4075,2850 4075,3280 3375,3280 3375,3040 2400,3040 2400,2850
GND on Bottom Layer "Bottom_Digital_GND" (solid, remove dead copper, shelved, pour order 11): 1417.32,6929.13 4960.63,6929.13 4960.63,2850 4075,2850 4075,3300 3375,3300 3375,2850 1417.32,2850

## Keep-outs
Keep-Out Layer:
  the board outline again, w3.94

## Other copper
Top Layer:
  region net GND: 3600,3300 3600,2780 3991.65,2780 3991.65,2300 3920,2300 3920,1880 3140,1880 3140,2500 2700,2500 2260,2500 2260,2000 1560,2000 1560,2700 2460,2700 2460,3000 3140,3000 3400,3000 3400,3300
Bottom Layer:
  region net NetC8_U_PS2_2: 3821.65,2459.61 3751.65,2459.61 3621.65,2459.61 3621.65,2779.61 4591.65,2779.61 4591.65,2569.61 4141.65,2569.61 4141.65,2509.61 4061.65,2509.61 4061.65,2569.61 4061.65,2729.61 3751.65,2729.61 3751.65,2499.61 3821.65,2499.61
  region net +12V: 3821.65,2429.61 3751.65,2429.61 3751.65,2439.61 3581.65,2439.61 3581.65,2780 3261.65,2780 3261.65,2389.61 3821.65,2389.61
  region net GND: 3821.65,2369.61 3261.65,2369.61 3261.65,1899.61 3971.65,1899.61 3971.65,2709.61 3841.65,2709.61 3841.65,2269.61 3751.65,2269.61 3751.65,2339.61 3821.65,2339.61
  region net NetR7_U_PS2_1: 3991.65,2319.61 4071.65,2319.61 4071.65,2239.61 4121.65,2239.61 4121.65,2219.61 4011.65,2219.61 4011.65,2239.61 4051.65,2239.61 4051.65,2299.61 3991.65,2299.61
  region net +5V: 4031.65,1899.61 4031.65,2149.61 4591.65,2149.61 4591.65,1979.61 4151.65,1979.61 4151.65,1899.61
  region net +3V3: 2320.79,1900 2320.79,2150 2880.79,2150 2880.79,1980 2440.79,1980 2440.79,1900
  region net NetR7_U_PS1_1: 2280.79,2320 2360.79,2320 2360.79,2240 2410.79,2240 2410.79,2220 2300.79,2220 2300.79,2240 2340.79,2240 2340.79,2300 2280.79,2300
  region net GND: 2110.79,2370 1550.79,2370 1550.79,1900 2260.79,1900 2260.79,2710 2130.79,2710 2130.79,2270 2040.79,2270 2040.79,2340 2110.79,2340
  region net +12V: 2110.79,2430 2040.79,2430 2040.79,2440 1870.79,2440 1870.79,2780 1580,2780 1550.79,2750.79 1550.79,2390 2110.79,2390
  region net NetC8_U_PS1_2: 2110.79,2460 2040.79,2460 1910.79,2460 1910.79,2780 2880.79,2780 2880.79,2570 2430.79,2570 2430.79,2510 2350.79,2510 2350.79,2570 2350.79,2730 2040.79,2730 2040.79,2500 2110.79,2500
  region net +12V: 3940,2940 1740,2940 1580,2780 1870.79,2780 1870.79,2860 3260,2860 3260,2780 3581.65,2780 3580,2781.65 3580,2860 3940,2860
  text "v 1.0" at 1950,5950 h60 r270

## Text inside footprints (layer, text, board x,y; h text height)
J1: Bottom Overlay "1" at 2868.51,6351.38 h50; Bottom Overlay "15" at 2368.51,6551.38 h50
P5: Top Overlay "52" at 4217.72,5707.87 h50 r270; Top Overlay "51" at 4099.61,5707.87 h50 r270; Top Overlay "99" at 4118.98,3070.39 h50 r270; Top Overlay "100" at 4218.98,3070.39 h50 r270; Top Overlay "50" at 2218.98,3070.39 h50 r270; Top Overlay "49" at 2118.98,3070.39 h50 r270; Top Overlay "1" at 2118.98,5650.39 h50 r270; Top Overlay "2" at 2218.98,5650.39 h50 r270